# EAGLE board PCB-4SLIDER20 (EAGLE 6.5.0)
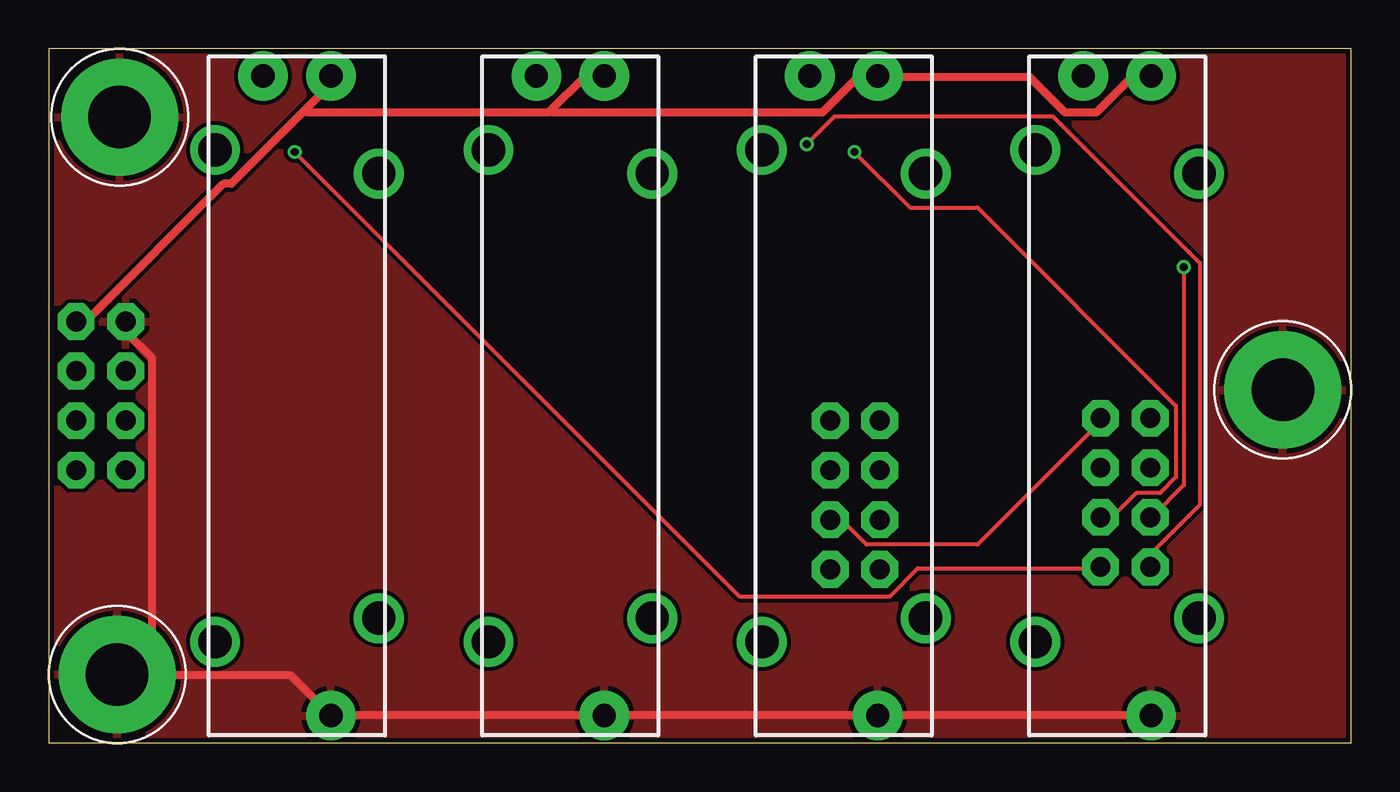
[diagram p0: board, top side]
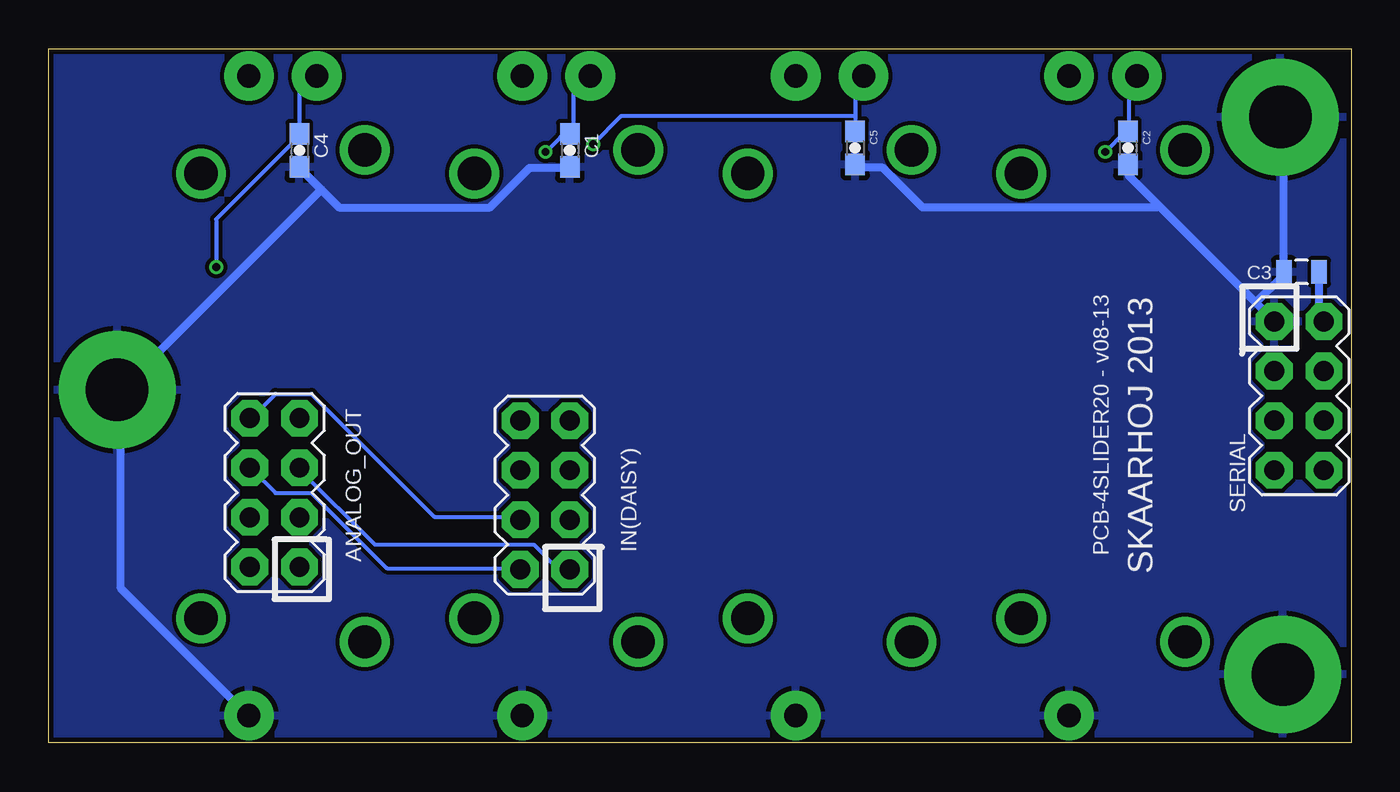
[diagram p1: board, bottom side, seen from below]

Size 66.68 x 35.56 mm. Coordinates in mm from the lower left corner, seen from the top.
Outline: 0,0 66.68,0 66.68,35.56 0,35.56 0,0
Copper layers (1*16): Top 0.035mm / dielectric 1.5mm / Bottom 0.035mm
Design rules "Fusion_eagle_rule_v1.1": minimum track width 6mil, minimum drill 12mil, track to track 6mil, track to pad 6mil, pad to pad 6mil, via to via 6mil, smd to smd 0mil, copper to edge 10mil, drill to drill 10mil, minimum pad ring 10mil, minimum via ring 6mil, stop-mask expansion 2mil, vias tented up to drill 100mil, thermal gap 10mil
Net classes: 0 default: width 0.203 mm, drill 0.406 mm, clearance 0.203 mm; 1 Power: width 0.406 mm, drill 0.61 mm, clearance 0.203 mm

## Footprints (pad centres in the part's own frame; a part is rotated, then mirrored left to right if it is on the bottom)
2X4 = drill 1.016 pad 1.88 octagon: 1 -3.81,-1.27; 2 -3.81,1.27; 3 -1.27,-1.27; 4 -1.27,1.27; 5 1.27,-1.27; 6 1.27,1.27; 7 3.81,-1.27; 8 3.81,1.27
0603-CAP = smd 1.1 x 1: 1 -0.85,0; 2 0.85,0
0805 = smd 0.8 x 1.2: 1 -0.9,0; 2 0.9,0
SLIDER20 = drill 1.194 pad 2.54: 1 -16.383,1.74; 2A -16.383,-1.74; 3 16.383,1.74 | drill 1.702: P$1 -11.392,4.191; P$2 11.392,4.191; P$3 12.598,-4.191; P$4 -12.598,-4.191
3.2MMPAD6MM = drill 3.2 pad 6: P$1 0,0

## Placement (x,y rotation side)
ANALOG_OUT  M04X2  [2X4]  55.12,12.83 90 bottom
C1  10nF  [0603-CAP]  40.01,30.35 270 bottom
C2  10nF  [0603-CAP]  11.43,30.48 270 bottom
C3  10uF  [0805]  2.54,24.13 180 bottom
C4  10nF  [0603-CAP]  53.85,30.35 270 bottom
C5  10nF  [0603-CAP]  25.4,30.48 270 bottom
IN(DAISY)  M04X2  [2X4]  41.27,12.7 90 bottom
POT1  10K  [SLIDER20]  12.7,17.78 270 top
POT2  10K  [SLIDER20]  26.7,17.78 270 top
POT3  10K  [SLIDER20]  40.7,17.78 270 top
POT4  10K  [SLIDER20]  54.7,17.78 270 top
SERIAL  M04X2  [2X4]  2.67,17.78 270 bottom
U$1  GNDPAD6MM  [3.2MMPAD6MM]  3.63,32.06 0 top
U$15  GNDPAD6MM  [3.2MMPAD6MM]  3.5,3.5 0 top
U$21  GNDPAD6MM  [3.2MMPAD6MM]  63.18,18.09 0 top

## Library data of the parts
ANALOG_OUT C1-C5 IN(DAISY) SERIAL = SparkFun
POT1-POT4 U$1 U$15 U$21 = SKAARHOJ

## Nets
5V [Power]: C3.1 POT1.1 POT2.1 POT3.1 POT4.1 SERIAL.2
ANALOG1: ANALOG_OUT.1 C2.1 POT1.2A
ANALOG2: ANALOG_OUT.2 C5.1 POT2.2A
ANALOG3: ANALOG_OUT.3 C1.1 POT3.2A
ANALOG4: ANALOG_OUT.4 C4.1 POT4.2A
GND [Power]: C1.2 C2.2 C3.2 C4.2 C5.2 POT1.3 POT2.3 POT3.3 POT4.3 SERIAL.1 U$1.P$1 U$15.P$1 U$21.P$1
N$1: ANALOG_OUT.5 IN(DAISY).1
N$2: ANALOG_OUT.7 IN(DAISY).3
N$3: ANALOG_OUT.6 IN(DAISY).2
N$4: ANALOG_OUT.8 IN(DAISY).4

## Tracks (layer width: path | path; a pad name or v marks a point on that pad's centre or on a via)
5V
  Top 0.406: 13.11,32.41 14.43,33.73 14.43,34.14 POT1.1 | 13.11,32.41 9.35,28.65 8.94,28.65 2.03,21.74 1.42,21.74 SERIAL.2 | 25.7,32.41 25.6,32.31 13.21,32.31 13.11,32.41 | 25.7,32.41 27.43,34.14 28.25,34.14 POT2.1 | 25.7,32.41 25.81,32.31 39.62,32.31 41.45,34.14 42.27,34.14 POT3.1 42.47,34.14 50.19,34.14 52.02,32.31 53.65,32.31 55.47,34.14 56.29,34.14 POT4.1
  Bottom 0.406: C3.1 1.63,23.98 1.63,21.95 1.42,21.74 SERIAL.2
ANALOG1  (via drill 0.41)
  Top 0.203: v12.6,30.28 35.36,7.52 43.08,7.52 44.5,8.94 53.85,8.94 ANALOG_OUT.1
  Bottom 0.203: POT1.2A 10.97,34.14 11.38,33.73 11.38,31.5 C2.1 11.58,31.29 v12.6,30.28
ANALOG2  (via drill 0.41)
  Top 0.203: v38.81,30.68 40.23,32.11 51.41,32.11 58.93,24.59 58.93,12.19 56.49,9.75 56.49,9.14 ANALOG_OUT.2
  Bottom 0.203: 25.4,32.11 25.4,33.73 24.99,34.14 POT2.2A | 25.4,32.11 C5.1 | v38.81,30.68 37.39,32.11 25.4,32.11
ANALOG3  (via drill 0.41)
  Top 0.203: v41.25,30.28 44.09,27.43 47.55,27.43 57.71,17.27 57.71,13.61 56.9,12.8 55.68,12.8 54.46,11.58 53.85,11.58 ANALOG_OUT.3
  Bottom 0.203: 39.83,31.7 39.83,33.33 39.01,34.14 POT3.2A | 39.83,31.7 39.83,31.29 C1.1 39.83,31.7 | 39.83,31.7 v41.25,30.28
ANALOG4  (via drill 0.41)
  Top 0.203: v58.12,24.38 58.12,13.21 56.49,11.58 ANALOG_OUT.4
  Bottom 0.203: POT4.2A 53.03,34.14 53.85,33.33 C4.1 53.85,31.09 58.12,26.82 v58.12,24.38
GND
  Top 0.406: POT4.3 56.29,1.42 42.47,1.42 POT3.3 42.27,1.42 28.45,1.42 POT2.3 28.25,1.42 14.63,1.42 POT1.3 14.43,1.42 12.39,3.45 5.28,3.45 | 5.28,3.45 3.66,3.45 U$15.P$1 5.28,3.45 | 5.28,3.45 5.28,19.71 4.06,20.93 4.06,21.54 SERIAL.1
  Bottom 0.406: 52.73,28.35 53.85,29.46 C4.2 | 52.73,28.35 51.82,27.43 44.09,27.43 42.06,29.46 40.03,29.46 C1.2 | 52.73,28.35 62.99,18.09 U$21.P$1 62.99,17.88 62.99,7.92 56.49,1.42 POT4.3 | 4.88,22.55 4.06,21.74 SERIAL.1 | 4.88,22.55 9.86,27.53 | 9.86,27.53 11.38,29.06 11.38,29.46 C2.2 | C5.2 25.4,29.46 23.98,29.46 21.95,27.43 9.96,27.43 9.86,27.53 | 4.88,22.55 3.45,23.98 C3.2 3.45,24.18 3.45,31.9 U$1.P$1
  pour Top: 0,0 0,35.56 67.31,35.56 67.31,0
  pour Bottom: 0,0 0,35.56 67.31,35.56 67.31,0
N$1
  Bottom 0.203: IN(DAISY).1 40.03,8.94 40.64,8.94 41.86,10.16 49.99,10.16 53.85,14.02 ANALOG_OUT.5
N$2
  Top 0.203: IN(DAISY).3 40.03,11.38 40.64,11.38 41.86,10.16 47.55,10.16 53.85,16.46 ANALOG_OUT.7
N$3
  Bottom 0.203: IN(DAISY).2 42.67,8.94 49.38,8.94 53.24,12.8 55.07,12.8 56.29,14.02 ANALOG_OUT.6
N$4
  Bottom 0.203: IN(DAISY).4 42.67,11.58 46.94,11.58 53.24,17.88 55.07,17.88 56.29,16.66 ANALOG_OUT.8

## Text on the board
_bsilk: SKAARHOJ 2013 | PCB-4SLIDER20 - v08-13